# EAGLE board L1-Left (EAGLE 7.2.0)
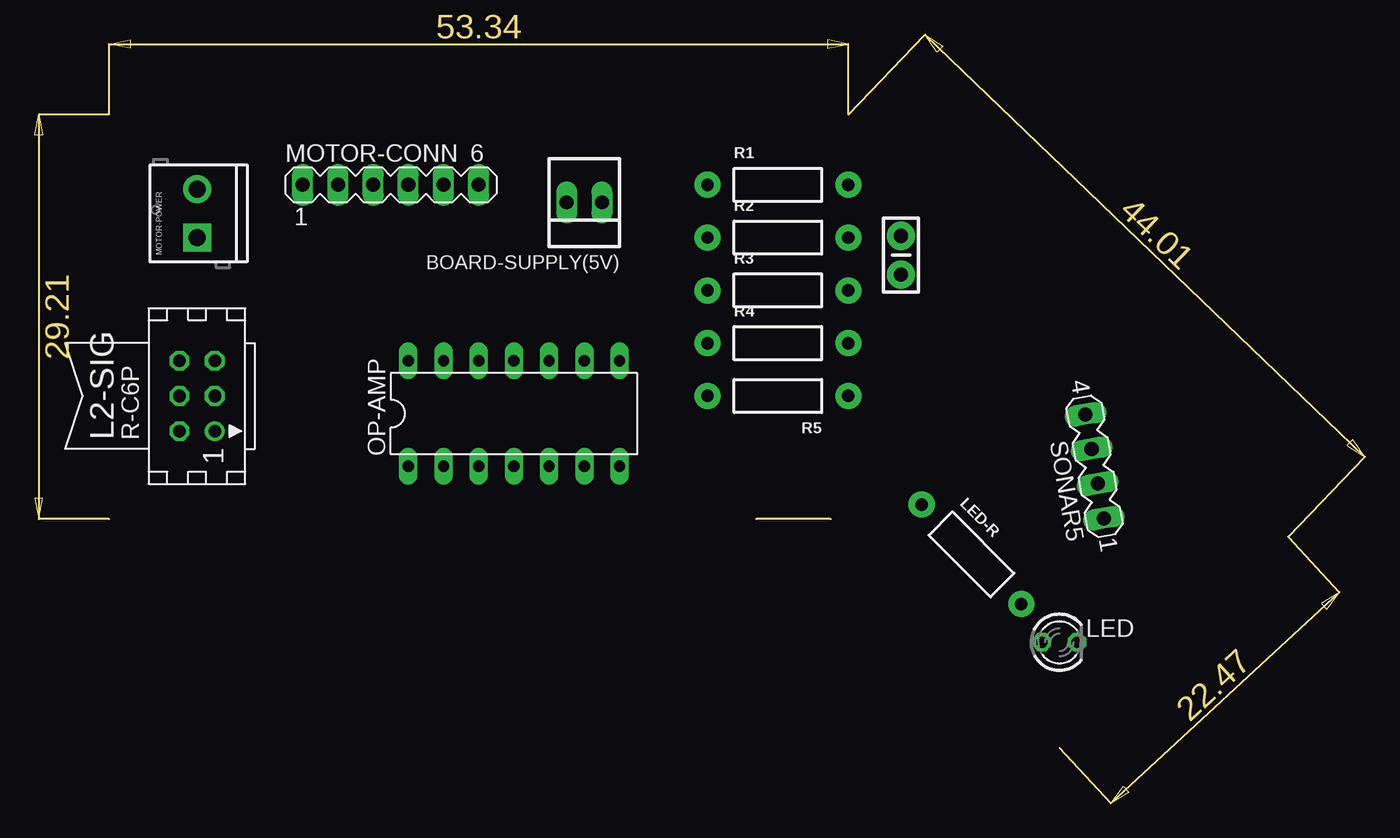
[diagram p0: board, top side]
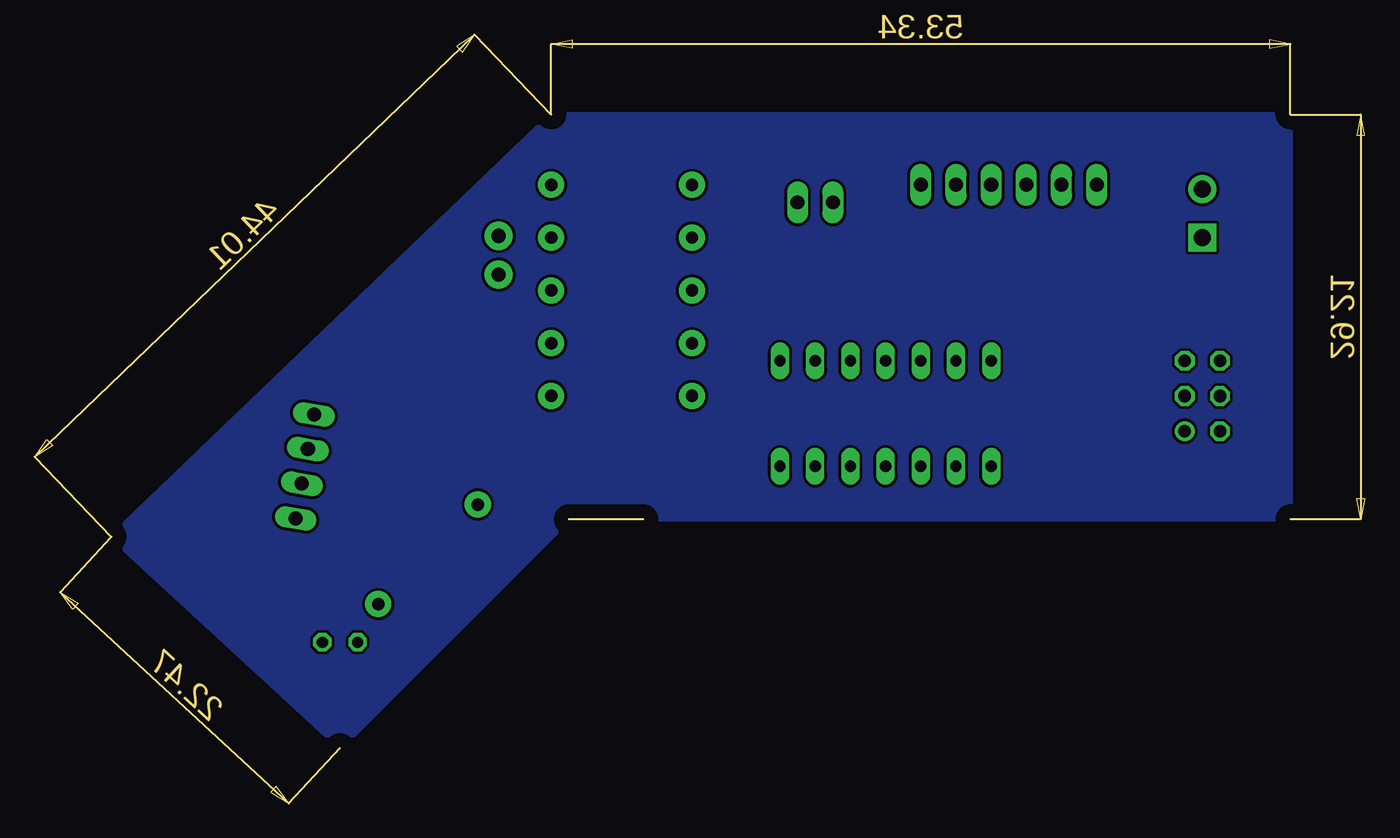
[diagram p1: board, bottom side, seen from below]

Size 96 x 55.49 mm. Coordinates in mm from the lower left corner, seen from the top.
Copper layers (1*16): Top 0.035mm / dielectric 1.5mm / Bottom 0.035mm
Design rules "default": minimum track width 10mil, minimum drill 24mil, track to track 8mil, track to pad 8mil, pad to pad 8mil, via to via 8mil, smd to smd 8mil, copper to edge 40mil, drill to drill 8mil, minimum pad ring 10mil, minimum via ring 8mil, stop-mask expansion 4mil, vias tented up to drill 0mil, thermal gap 10mil

## Footprints (pad centres in the part's own frame; a part is rotated, then mirrored left to right if it is on the bottom)
22-23-2021 = drill 1 long: 1 -1.27,0; 2 1.27,0
CAP-PTH-SMALL-KIT = drill 1.016 pad 2.032: 1 -1.397,0; 2 1.397,0
CON06 = drill 0.914: 1 -2.54,-1.27 | drill 0.914 octagon: 2 -2.54,1.27; 3 0,-1.27; 4 0,1.27; 5 2.54,-1.27; 6 2.54,1.27
LED3MM = drill 0.813 octagon: A -1.27,0; K 1.27,0
AXIAL-0.4 = drill 0.9 pad 1.88: P$1 -5.08,0; P$2 5.08,0
MA06-1 = drill 1.016 long: 1 -6.35,0; 2 -3.81,0; 3 -1.27,0; 4 1.27,0; 5 3.81,0; 6 6.35,0
SCREWTERMINAL-3.5MM-2 = drill 1.2 pad 2.032 square: 1 0,0 | drill 1.2 pad 2.032: 2 3.5,0
DIL14 = drill 0.813 long: 1 -7.62,-3.81; 2 -5.08,-3.81; 3 -2.54,-3.81; 4 0,-3.81; 5 2.54,-3.81; 6 5.08,-3.81; 7 7.62,-3.81; 8 7.62,3.81; 9 5.08,3.81; 10 2.54,3.81; 11 0,3.81; 12 -2.54,3.81; 13 -5.08,3.81; 14 -7.62,3.81
MA04-1 = drill 1.016 long: 1 -3.81,0; 2 -1.27,0; 3 1.27,0; 4 3.81,0

## Placement (x,y rotation side)
BOARD-SUPPLY(5V)  [22-23-2021]  39.67,43.38 180 top
C1  [CAP-PTH-SMALL-KIT]  62.53,39.57 90 top
L2-SIG  [CON06]  11.73,29.41 90 top
LED  [LED3MM]  73.96,11.63 0 top
LED-R  [AXIAL-0.4]  67.61,17.98 315 top
MOTOR-CONN  [MA06-1]  25.7,44.65 0 top
MOTOR-POWER  [SCREWTERMINAL-3.5MM-2]  11.73,40.84 90 top
OP-AMP  [DIL14]  34.59,28.14 0 top
R1  [AXIAL-0.4]  53.64,44.65 0 top
R2  [AXIAL-0.4]  53.64,40.84 0 top
R3  [AXIAL-0.4]  53.64,37.03 0 top
R4  [AXIAL-0.4]  53.64,33.22 0 top
R5  [AXIAL-0.4]  53.64,29.41 180 top
SONAR5  [MA04-1]  76.5,24.33 100 top

## Library data of the parts
BOARD-SUPPLY(5V) = con-molex
C1 LED-R R1-R5 = SparkFun-Passives
L2-SIG = con-harting
LED = led
MOTOR-CONN SONAR5 = con-lstb
MOTOR-POWER = SparkFun-Connectors
OP-AMP = 40xx

## Tracks (layer width: path | path; a pad name or v marks a point on that pad's centre or on a via)
L1-RIGHT
  pour Bottom: 5.38,49.73 58.72,49.73 90.47,19.25 73.96,4.01 57.45,20.52 5.38,20.52